# EAGLE board onboard_3 (EAGLE 7.5.0)
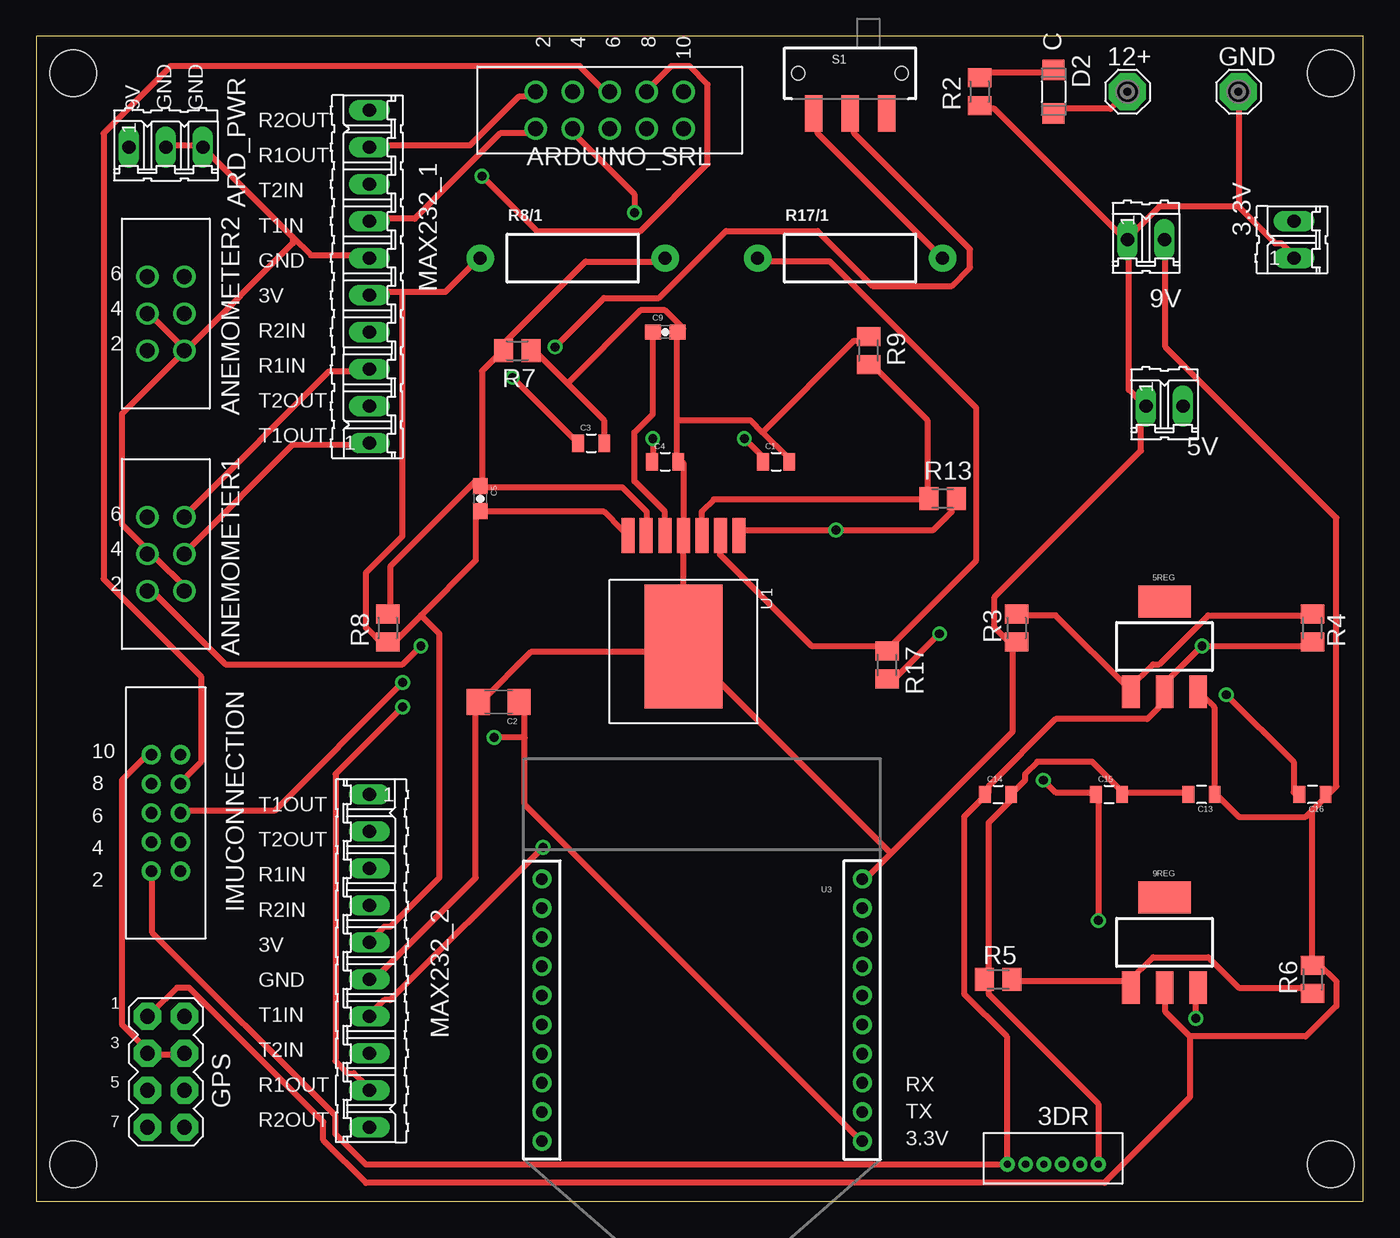
[diagram p0: board, top side]
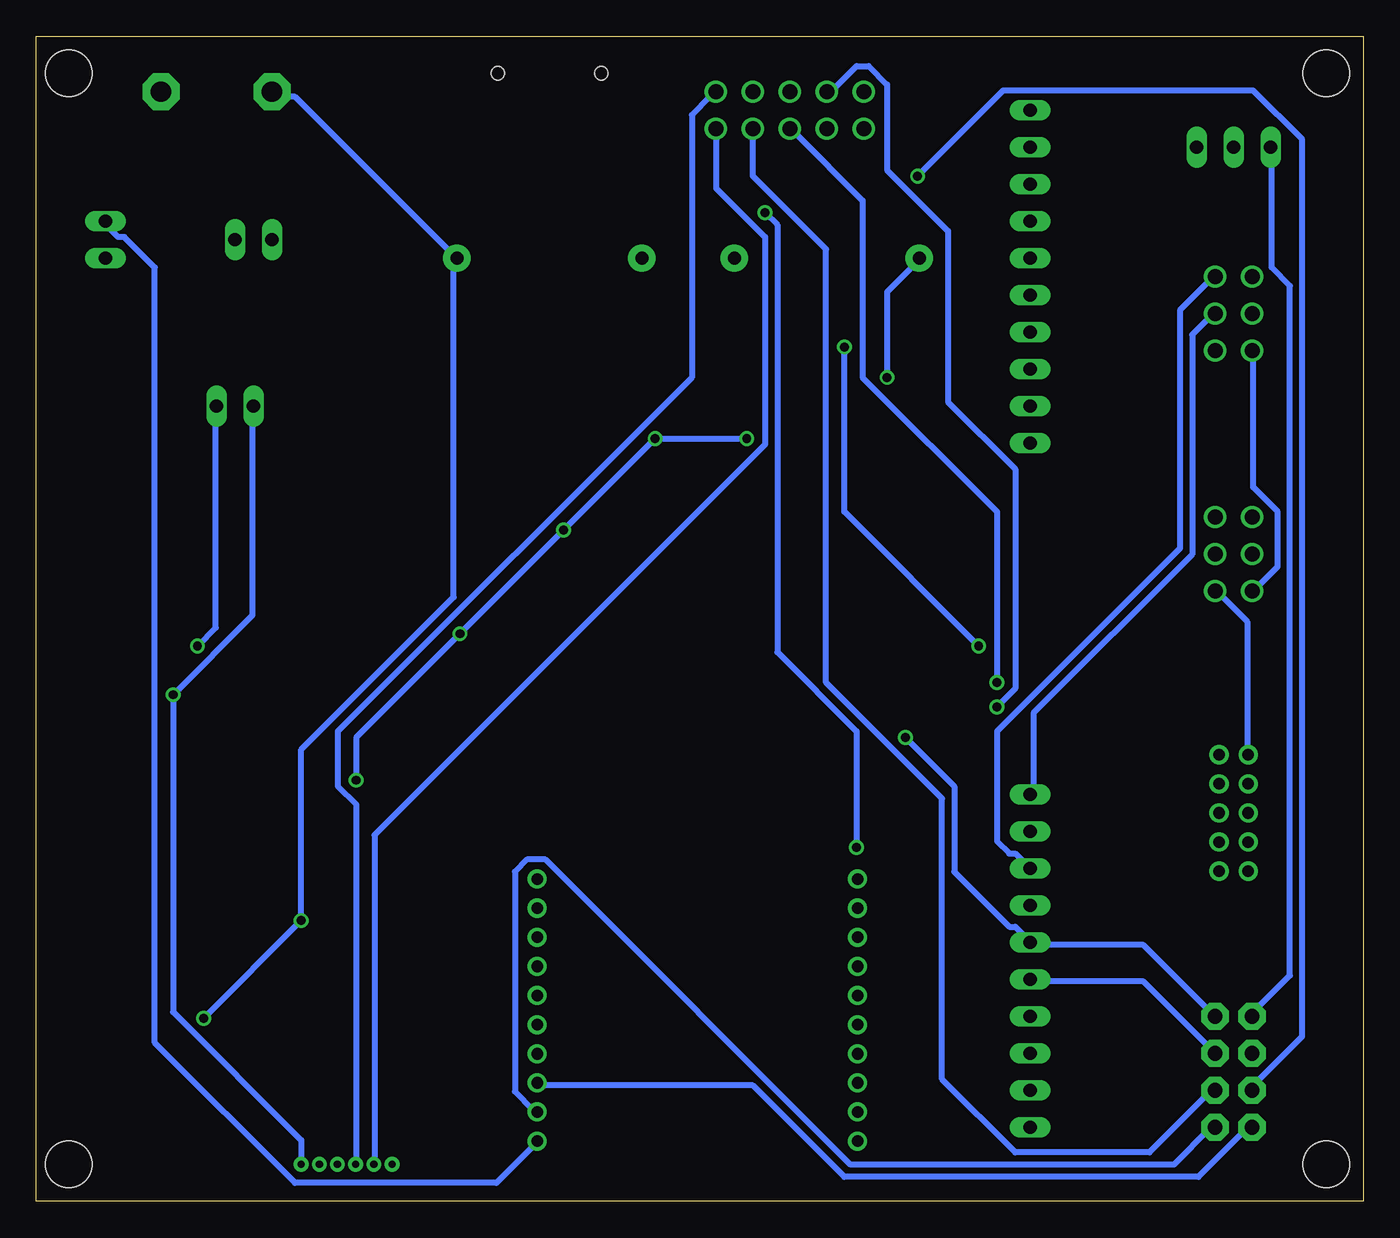
[diagram p1: board, bottom side, seen from below]

Size 91.11 x 80 mm. Coordinates in mm from the lower left corner, seen from the top.
Outline: 0,0 91.11,0 91.11,80 0,80 0,0
Copper layers (1*16): Top 0.035mm / dielectric 1.5mm / Bottom 0.035mm
Design rules "onboard_3": minimum track width 10mil, minimum drill 24mil, track to track 0.205mm, track to pad 0.205mm, pad to pad 0.205mm, via to via 0.205mm, smd to smd 8mil, copper to edge 40mil, drill to drill 8mil, minimum pad ring 10mil, minimum via ring 8mil, stop-mask expansion 4mil, vias tented up to drill 0mil, thermal gap 10mil
Net classes: 0 default: width 0.406 mm, drill 0.406 mm, clearance 0.432 mm
Holes 3.2 mm at 2.54,77.47 88.9,77.47 88.9,2.54 2.54,2.54

## Footprints (pad centres in the part's own frame; a part is rotated, then mirrored left to right if it is on the bottom)
02P = drill 0.914 long: 1 -1.27,0; 2 1.27,0
653006114822 = drill 0.5: 1 0.625,0; 2 -0.625,0; 3 -1.875,0; 4 -3.125,0; 5 -4.375,0; 6 -5.625,0
SOT223 = smd 1.219 x 2.235: 1 -2.311,-3.099; 2 0,-3.099; 3 2.311,-3.099 | smd 3.6 x 2.2: 4 0,3.099
SE14 = drill 1.397 pad 2.54 octagon: MP 0,0
61200622323 = drill 1.02: 1 -2.54,-1.27; 2 -2.54,1.27; 3 0,-1.27; 4 0,1.27; 5 2.54,-1.27; 6 2.54,1.27
03P = drill 0.914 long: 1 -2.54,0; 2 0,0; 3 2.54,0
61201022323 = drill 1.02: 1 -2.54,-1.27; 2 -2.54,1.27; 3 0,-1.27; 4 0,1.27; 5 2.54,-1.27; 6 2.54,1.27; 7 5.08,-1.27; 8 5.08,1.27; 9 7.62,-1.27; 10 7.62,1.27
0805 = smd 0.8 x 1.2: 1 -0.9,0; 2 0.9,0
1206 = smd 1.6 x 1.8: 1 -1.4,0; 2 1.4,0
0603-CAP = smd 1.1 x 1: 1 -0.85,0; 2 0.85,0
1206' = smd 1.4 x 1.5: 1 -1.5,0; 2 1.5,0
2X4 = drill 1.016 pad 1.88 octagon: 1 -3.81,-1.27; 2 -3.81,1.27; 3 -1.27,-1.27; 4 -1.27,1.27; 5 1.27,-1.27; 6 1.27,1.27; 7 3.81,-1.27; 8 3.81,1.27
62501021621 = drill 0.8: 1 -4,-1; 2 -4,1; 3 -2,-1; 4 -2,1; 5 0,-1; 6 0,1; 7 2,-1; 8 2,1; 9 4,-1; 10 4,1
10P = drill 0.914 long: 1 -11.43,0; 2 -8.89,0; 3 -6.35,0; 4 -3.81,0; 5 -1.27,0; 6 1.27,0; 7 3.81,0; 8 6.35,0; 9 8.89,0; 10 11.43,0
M2012 = smd 1.3 x 1.6: 1 -0.95,0; 2 0.95,0
AXIAL-0.5 = drill 0.9 pad 1.88: P$1 -6.35,0; P$2 6.35,0
SWITCH-SPDT-SMD = smd 1.2 x 2.5: 1 -2.5,-2.75; 2 0,-2.75; 3 2.5,-2.75 | hole 0.9: -3.55,0; 3.55,0
TO-PMOD-7 = smd 0.89 x 2.41: 1 -3.81,-7.63; 2 -2.54,-7.63; 3 -1.27,-7.63; 4 0,-7.63; 5 1.27,-7.63; 6 2.57,-7.63; 7 3.81,-7.63 | smd 5.35 x 8.54: EP 0,0
XBEE-1 = drill 0.8: 1 -11,20; 2 -11,18; 3 -11,16; 4 -11,14; 5 -11,12; 6 -11,10; 7 -11,8; 8 -11,6; 9 -11,4; 10 -11,2; 11 11,2; 12 11,4; 13 11,6; 14 11,8; 15 11,10; 16 11,12; 17 11,14; 18 11,16; 19 11,18; 20 11,20

## Placement (x,y rotation side)
3.3V  [02P]  86.36,66.04 90 top
3DR  653006114822  [653006114822]  67.31,2.54 180 top
5REG  V_REG_317SMD  [SOT223]  77.47,38.1 0 top
5V  [02P]  77.47,54.61 0 top
9REG  V_REG_317SMD  [SOT223]  77.47,17.78 0 top
9V  [02P]  76.2,66.04 0 top
12+  SE14  [SE14]  74.93,76.2 0 top
ANEMOMETER1  61200622323  [61200622323]  8.89,44.45 90 top
ANEMOMETER2  61200622323  [61200622323]  8.89,60.96 90 top
ARD_PWR  [03P]  8.89,72.39 0 top
ARDUINO_SRL  61201022323  [61201022323]  36.83,74.93 0 top
C1  1uF  [0805]  50.8,50.8 0 top
C2  100uF  [1206]  31.75,34.29 180 top
C3  1uF  [0805]  38.1,52.07 0 top
C4  10uF  [0805]  43.18,50.8 0 top
C5  0.022uF  [0603-CAP]  30.48,48.26 270 top
C9  0.022uF  [0603-CAP]  43.18,59.69 0 top
C13  0.1UF  [0805]  80.01,27.94 180 top
C14  1UF  [0805]  66.04,27.94 0 top
C15  0.1UF  [0805]  73.66,27.94 0 top
C16  1UF  [0805]  87.63,27.94 180 top
D2  [1206']  69.85,76.2 270 top
GND  SE14  [SE14]  82.55,76.2 0 top
GPS  [2X4]  8.89,8.89 270 top
IMUCONNECTION  [62501021621]  8.89,26.67 90 top
MAX232_1  [10P]  22.86,63.5 90 top
MAX232_2  [10P]  22.86,16.51 270 top
R2  [M2012]  64.77,76.2 90 top
R3  750 ohms  [M2012]  67.31,39.37 90 top
R4  240 ohms  [M2012]  87.63,39.37 270 top
R5  1.5k  [M2012]  66.04,15.24 0 top
R6  240 ohms  [M2012]  87.63,15.24 90 top
R7  1.07k  [M2012]  33.02,58.42 180 top
R8  5.62k  [M2012]  24.13,39.37 90 top
R8/1  [AXIAL-0.5]  36.83,64.77 0 top
R9  11.8k  [M2012]  57.15,58.42 270 top
R13  68.1k  [M2012]  62.23,48.26 0 top
R17  100k  [M2012]  58.42,36.83 270 top
R17/1  [AXIAL-0.5]  55.88,64.77 0 top
S1  [SWITCH-SPDT-SMD]  55.88,77.47 0 top
U1  LMZ14203  [TO-PMOD-7]  44.45,38.1 180 top
U3  XBEE  [XBEE-1]  45.72,24.13 180 top

## Library data of the parts
3.3V 5V 9V ARD_PWR MAX232_1 MAX232_2 = con-amp-quick; OC_FARNELL: unknown; OC_NEWARK: unknown
3DR ARDUINO_SRL = Wire_to_Board_Connectors_rev15d; OC_NEWARK: unknown
5REG 9REG U1 = SparkFun-PowerIC; OC_NEWARK: unknown
12+ GND = solpad; OC_NEWARK: unknown
ANEMOMETER1 ANEMOMETER2 IMUCONNECTION = Wurth_Elektronik_Electromechanic_Wire_to_Board_Connectors_rev15c; OC_NEWARK: unknown
C1 C3 = SparkFun-Capacitors; MF: VISHAY/SPRAGUE; MPN: 1C10Z5U104M050R; OC_NEWARK: 66C6034; PROD_ID: CAP-08064
C2 C4 C5 C9 = SparkFun-Capacitors; OC_NEWARK: unknown
C13-C16 = SparkFun-Capacitors; OC_NEWARK: unknown; PROD_ID: CAP-08064
D2 = Wuerth_Elektronik_LEDs_rev15b; COMPANY-URL: http://www.we-online.de; CREATED-BY: Christin Otto; CREATED-DATE: APR 2013; DATASHEET-URL: http://katalog.we-online.de/en/led/WL-SMCW?m=t&sq=smcw&sp=&sp=http%3A%2F%2Fwww.we-online.de%2Fweb%2Fen%2Felectronic_components%2Fsearchpage_PBS.php%3Fsearch%3Dsmcw#vs_t2:2; MANUFACTURER: Würth Elektronik eiSos GmbH; OC_NEWARK: unknown
GPS = SparkFun-Connectors; OC_NEWARK: unknown
R2 R7-R9 R13 R17 = resistor; OC_NEWARK: unknown
R3-R6 = adafruit; OC_NEWARK: unknown
R8/1 R17/1 = SparkFun-Passives; OC_NEWARK: unknown
S1 = SparkFun-Electromechanical; OC_NEWARK: unknown
U3 = SparkFun; OC_NEWARK: unknown

## Nets
3.3V: 3.3V.2 C2.1 C3.1 C5.2 GPS.2 MAX232_1.5 MAX232_2.5 R8.1 R8/1.P$1 U1.7 U3.1
3DR_RX: 3DR.3 ARDUINO_SRL.10
3DR_TX: 3DR.2 ARDUINO_SRL.9
+5V: 3DR.1 5REG.2 5V.2 C14.1 IMUCONNECTION.2 R4.2
+9V: 5REG.3 9REG.2 9V.2 ARD_PWR.1 C13.1 C16.1 GPS.1 R6.2
+12V: 9REG.3 12+.MP C1.1 C4.1 C15.1 D2.2 R13.2 R17.2 R17/1.P$2 S1.1 U1.1
A1_IN_RX: ANEMOMETER1.5 MAX232_1.3
A1_IN_TX: ANEMOMETER1.3 MAX232_1.1
A1_RX: ARDUINO_SRL.2 MAX232_1.9
A1_TX: ARDUINO_SRL.1 MAX232_1.7
A2_IN_RX: ANEMOMETER2.5 MAX232_2.3
A2_IN_TX: ANEMOMETER2.3 MAX232_2.1
A2_RX: ARDUINO_SRL.4 MAX232_2.9
A2_TX: ARDUINO_SRL.3 MAX232_2.7
CTS: 3DR.4
GND: 3.3V.1 3DR.6 5V.1 9V.1 ANEMOMETER1.1 ANEMOMETER1.4 ANEMOMETER2.1 ANEMOMETER2.4 ARD_PWR.2 ARD_PWR.3 C1.2 C2.2 C3.2 C4.2 C9.2 C13.2 C14.2 C15.2 C16.2 GND.MP GPS.3 GPS.4 IMUCONNECTION.10 MAX232_1.6 MAX232_2.6 R2.1 R3.1 R5.1 R7.1 R9.1 U1.4 U1.EP U3.10
GPS_RX: ARDUINO_SRL.8 GPS.5
GPS_TX: ARDUINO_SRL.7 GPS.6
IMU_RX: ARDUINO_SRL.6 IMUCONNECTION.7
IMU_TX: ARDUINO_SRL.5 IMUCONNECTION.5
N$1: U3.5
N$2: 5REG.1 R3.2 R4.1
N$3: 9REG.1 R5.2 R6.1
N$4: R9.2 R13.1 U1.3
N$5: R17.1 R17/1.P$1 U1.2
N$6: C9.1 U1.5
N$7: D2.1 R2.2
N$8: C5.1 R7.2 R8.2 R8/1.P$2 U1.6
N$9: ANEMOMETER1.2 ANEMOMETER2.2 S1.2
N$24: U3.4
N$26: U3.6
N$27: U3.7
N$28: U3.8
N$29: U3.9
N$31: U3.11
N$32: U3.12
N$33: U3.13
N$34: U3.14
N$35: U3.15
N$36: U3.16
N$37: U3.17
N$38: U3.18
N$39: U3.19
N$40: U3.20
RTS: 3DR.5
XBEE_RX: GPS.7 U3.3
XBEE_TX: GPS.8 U3.2

## Tracks (layer width: path | path; a pad name or v marks a point on that pad's centre or on a via)
3.3V  (via drill 0.61)
  Top 0.406: v32.69,56.58 36.88,52.39 C3.1 | 25.15,62.45 28.08,62.45 30.18,64.54 R8/1.P$1 | 25.15,62.45 23.05,62.45 MAX232_1.5 | U1.7 40.23,46.1 38.98,47.36 30.59,47.36 C5.2 30.18,47.36 30.18,44.01 26.4,40.23 | 26.4,40.23 24.73,38.56 24.31,38.56 R8.1 23.89,38.14 22.63,39.4 22.63,43.17 25.15,45.68 25.15,62.45 | 26.4,40.23 27.66,38.98 27.66,22.21 24.31,18.86 23.89,18.86 23.05,18.02 MAX232_2.5 | 33.53,31.85 33.53,27.24 56.58,4.19 U3.1 | 33.53,31.85 33.53,33.95 C2.1 | 33.53,31.85 v31.43,31.85
  Bottom 0.406: v32.69,56.58 32.69,62.45 30.59,64.54 R8/1.P$1 | GPS.2 10.48,12.99 15.09,17.6 22.63,17.6 MAX232_2.5 23.05,18.02 23.89,18.86 24.31,18.86 28.08,22.63 28.08,28.5 v31.43,31.85 | 3.3V.2 86.33,67.06 85.5,66.22 85.08,66.22 82.98,64.12 82.98,10.9 73.34,1.26 59.51,1.26 57,3.77 U3.1
3DR_RX
  Bottom 0.406: 3DR.3 69.15,2.93 69.15,27.24 70.41,28.5 70.41,32.27 46.1,56.58 46.1,74.6 44.84,75.86 ARDUINO_SRL.10
3DR_TX
  Bottom 0.406: 3DR.2 67.89,2.93 67.89,25.15 41.07,51.97 41.07,66.22 44.42,69.57 44.42,73.34 ARDUINO_SRL.9
+5V  (via drill 0.61)
  Top 0.406: R4.2 87.59,38.14 v80.05,38.14 77.11,35.2 5REG.2 77.11,34.78 77.11,33.95 76.28,33.11 69.99,33.11 65.38,28.5 65.38,28.08 C14.1 64.96,27.66 63.7,26.4 63.7,14.25 66.64,11.32 66.64,2.93 3DR.1 66.64,2.52 22.63,2.52 20.54,4.61 20.54,5.87 7.96,18.44 7.96,22.63 IMUCONNECTION.2
  Bottom 0.406: v80.05,38.14 78.79,39.4 78.79,54.48 5V.2
+9V
  Top 0.406: 5REG.3 80.05,34.78 80.89,33.95 80.89,28.08 C13.1 81.31,27.66 82.56,26.4 87.17,26.4 87.59,26.82 | 87.59,26.82 88.43,27.66 C16.1 88.85,28.08 89.27,28.5 89.27,46.94 77.53,58.67 77.53,65.8 9V.2 | 87.59,26.82 87.59,16.34 R6.2 88.01,16.34 89.27,15.09 89.27,13.41 87.17,11.32 79.21,11.32 | 79.21,11.32 77.53,12.99 77.53,14.67 9REG.2 | 79.21,11.32 79.21,7.12 73.34,1.26 22.63,1.26 19.7,4.19 19.7,5.45 10.48,14.67 9.64,14.67 7.96,12.99 GPS.1
  Bottom 0.406: ARD_PWR.1 6.29,72.08 6.29,64.12 5.03,62.87 5.03,15.51 7.54,12.99 GPS.1
+12V  (via drill 0.61)
  Top 0.406: D2.2 69.99,75.02 73.76,75.02 74.6,75.86 12+.MP | S1.1 53.65,74.6 53.65,73.34 62.03,64.96 R17/1.P$2 | R13.2 62.87,48.2 62.87,47.36 61.61,46.1 v54.9,46.1 48.62,46.1 U1.1 | v42.33,52.39 42.33,51.13 C4.1 | v48.62,52.39 49.87,51.13 C1.1 | v69.15,28.92 69.99,28.08 72.5,28.08 C15.1 72.92,27.66 v72.92,19.28 | v62.03,38.98 59.09,36.04 58.67,36.04 R17.2 | v79.63,12.57 79.63,14.67 9REG.3
  Bottom 0.406: 12+.MP 74.6,75.86 73.34,75.86 62.45,64.96 R17/1.P$2 62.45,64.54 62.45,41.49 72.92,31.01 v72.92,19.28 v79.63,12.57 | v42.33,52.39 v48.62,52.39 v54.9,46.1 v62.03,38.98 69.15,31.85 v69.15,28.92
A1_IN_RX
  Top 0.406: MAX232_1.3 22.63,57 20.12,57 10.48,47.36 ANEMOMETER1.5
A1_IN_TX
  Top 0.406: MAX232_1.1 22.63,51.97 17.6,51.97 10.48,44.84 ANEMOMETER1.3
A1_RX
  Top 0.406: MAX232_1.9 23.05,72.5 29.76,72.5 33.11,75.86 33.95,75.86 ARDUINO_SRL.2
A1_TX
  Top 0.406: MAX232_1.7 23.05,67.47 25.98,67.47 31.85,73.34 33.95,73.34 ARDUINO_SRL.1
A2_IN_RX
  Bottom 0.406: MAX232_2.3 23.89,23.89 24.31,23.89 25.15,24.73 25.15,32.27 12.57,44.84 12.57,61.19 10.48,63.28 ANEMOMETER2.5
A2_IN_TX
  Bottom 0.406: MAX232_2.1 22.63,28.08 22.63,33.53 11.73,44.42 11.73,59.51 10.48,60.77 ANEMOMETER2.3
A2_RX  (via drill 0.61)
  Top 0.406: v25.15,33.95 20.54,29.34 20.54,9.64 21.37,8.8 21.79,8.8 22.63,7.96 MAX232_2.9
  Bottom 0.406: v25.15,33.95 23.89,35.2 23.89,50.29 28.5,54.9 28.5,66.64 32.69,70.83 32.69,76.69 33.95,77.95 34.78,77.95 36.46,76.28 ARDUINO_SRL.4
A2_TX  (via drill 0.61)
  Top 0.406: v34.78,24.31 24.31,13.83 23.89,13.83 23.05,12.99 MAX232_2.7 | v41.07,67.89 41.07,69.15 36.88,73.34 ARDUINO_SRL.3
  Bottom 0.406: v34.78,24.31 34.78,32.27 40.23,37.72 40.23,67.06 v41.07,67.89
GND  (via drill 0.61)
  Top 0.406: 74.6,28.08 72.5,30.18 68.73,30.18 67.89,29.34 67.89,28.92 67.06,28.08 C14.2 67.06,27.66 65.38,25.98 65.38,15.51 R5.1 65.38,15.09 65.38,14.25 72.92,6.71 72.92,2.93 3DR.6 | 74.6,28.08 78.79,28.08 C13.2 | 74.6,28.08 C15.2 | R2.1 64.96,75.02 65.8,75.02 74.6,66.22 9V.1 | 82.56,68.31 85.08,65.8 85.5,65.8 86.33,64.96 3.3V.1 | 82.56,68.31 82.56,75.86 GND.MP | 82.56,68.31 77.11,68.31 75.02,66.22 9V.1 | v81.72,34.78 86.33,30.18 86.33,28.08 C16.2 | 9V.1 75.02,65.8 75.02,55.74 75.86,54.9 5V.1 75.86,54.48 75.86,51.55 65.8,41.49 65.8,39.4 67.06,38.14 | 36.46,56.16 34.37,58.26 R7.1 | 36.46,56.16 38.98,53.65 38.98,52.39 C3.2 | 44.01,53.65 44.01,51.13 C4.2 44.42,50.71 44.42,46.1 U1.4 44.42,45.68 44.42,38.14 U1.EP | 44.01,53.65 44.01,59.51 C9.2 44.42,59.93 43.17,61.19 41.49,61.19 36.46,56.16 | 49.87,52.81 49.03,53.65 44.01,53.65 | 49.87,52.81 51.55,51.13 C1.2 | 49.87,52.81 56.16,59.09 57,59.09 R9.1 | 67.06,38.14 67.06,32.27 58.67,23.89 | 58.67,23.89 57,22.21 U3.10 | U1.EP 44.42,37.72 33.95,37.72 30.59,34.37 C2.2 30.18,33.95 30.18,22.21 23.05,15.09 MAX232_2.6 | 58.67,23.89 44.84,37.72 U1.EP | GPS.4 10.06,10.06 7.96,10.06 GPS.3 7.54,10.48 5.87,12.15 5.87,28.92 7.54,30.59 IMUCONNECTION.10 | ANEMOMETER1.1 10.48,41.91 7.96,44.42 ANEMOMETER1.4 7.54,44.84 5.87,46.52 5.87,54.06 10.06,58.26 ANEMOMETER2.1 | ANEMOMETER2.4 7.96,60.77 10.06,58.67 ANEMOMETER2.1 | ARD_PWR.2 9.22,72.5 11.32,72.5 ARD_PWR.3 17.6,66.22 | 17.6,66.22 18.86,64.96 22.63,64.96 MAX232_1.6 | 17.6,66.22 17.6,65.8 10.48,58.67 ANEMOMETER2.1 | 67.06,38.14 R3.1
  Bottom 0.406: 5V.1 76.28,54.48 76.28,40.23 v81.72,34.78 81.72,12.99 72.92,4.19 72.92,2.93 3DR.6 | GPS.4 15.09,15.09 22.63,15.09 MAX232_2.6 | IMUCONNECTION.10 7.96,31.01 7.96,39.81 10.06,41.91 ANEMOMETER1.1
GPS_RX  (via drill 0.61)
  Top 0.406: v30.59,70.41 34.37,66.64 41.49,66.64 46.1,71.25 46.1,76.69 44.84,77.95 43.59,77.95 41.91,76.28 ARDUINO_SRL.8
  Bottom 0.406: v30.59,70.41 24.73,76.28 7.54,76.28 4.19,72.92 4.19,11.32 7.54,7.96 GPS.5
GPS_TX
  Bottom 0.406: ARDUINO_SRL.7 41.91,70.41 36.88,65.38 36.88,35.62 28.92,27.66 28.92,8.38 23.89,3.35 14.67,3.35 10.48,7.54 GPS.6
IMU_RX
  Top 0.406: IMUCONNECTION.7 10.06,28.92 11.32,30.18 11.32,36.04 4.61,42.75 4.61,73.34 9.22,77.95 37.3,77.95 38.98,76.28 ARDUINO_SRL.6
IMU_TX  (via drill 0.61)
  Top 0.406: v25.15,35.62 16.34,26.82 10.06,26.82 IMUCONNECTION.5
  Bottom 0.406: v25.15,35.62 25.15,47.36 34.37,56.58 34.37,68.73 38.98,73.34 ARDUINO_SRL.5
N$2
  Top 0.406: 75.02,35.2 69.99,40.23 67.47,40.23 R3.2 | 75.02,35.2 76.69,36.88 77.11,36.88 80.47,40.23 87.59,40.23 R4.1 | 75.02,35.2 5REG.1
N$3
  Top 0.406: 75.02,15.09 76.69,16.76 80.47,16.76 82.56,14.67 87.59,14.67 R6.1 | 75.02,15.09 67.06,15.09 R5.2 | 75.02,15.09 9REG.1
N$4
  Top 0.406: R9.2 57.42,57.42 61.19,53.65 61.19,48.62 R13.1 61.19,48.2 46.52,48.2 45.68,47.36 45.68,46.1 U1.3
N$5
  Top 0.406: U1.2 46.94,45.68 46.94,44.42 53.23,38.14 58.26,38.14 R17.1 58.67,38.14 64.54,44.01 64.54,54.48 54.48,64.54 49.87,64.54 R17/1.P$1
N$6
  Top 0.406: C9.1 42.33,59.51 42.33,54.06 41.07,52.81 41.07,49.45 43.17,47.36 43.17,46.1 U1.5
N$7
  Top 0.406: D2.1 69.57,77.53 64.96,77.53 R2.2
N$8
  Top 0.406: C5.1 30.59,49.45 30.59,57 31.85,58.26 R7.2 31.85,58.67 37.72,64.54 43.17,64.54 R8/1.P$2 | R8.2 24.31,40.65 24.31,43.59 30.18,49.45 C5.1 | U1.6 41.91,46.1 41.91,47.36 40.23,49.03 30.59,49.03 C5.1
N$9  (via drill 0.61)
  Top 0.406: v35.62,58.67 38.98,62.03 42.75,62.03 47.36,66.64 53.65,66.64 57.42,62.87 62.87,62.87 64.12,64.12 64.12,65.38 56.16,73.34 56.16,74.6 S1.2 | v26.4,38.14 25.15,36.88 12.99,36.88 7.96,41.91 ANEMOMETER1.2
  Bottom 0.406: v35.62,58.67 35.62,47.36 v26.4,38.14 | ANEMOMETER2.2 7.54,58.26 7.54,49.03 5.87,47.36 5.87,43.59 7.54,41.91 ANEMOMETER1.2
XBEE_RX
  Bottom 0.406: U3.3 56.58,7.96 41.91,7.96 35.62,1.68 11.32,1.68 7.96,5.03 GPS.7
XBEE_TX
  Bottom 0.406: U3.2 57,6.29 58.26,7.54 58.26,22.63 57.42,23.47 56.16,23.47 35.2,2.52 12.99,2.52 10.48,5.03 GPS.8

## Text on the board
tPlace: 2 / 4 / 6 / 8 / 10 | 9V / GND / GND | 6 / 4 / 2 | R2OUT / R1OUT / T2IN / T1IN / GND / 3V / R2IN / R1IN / T2OUT / T1OUT | 6 / 4 / 2 | 10 / 8 / 6 / 4 / 2 | 1 / 3 / 5 / 7 | T1OUT / T2OUT / R1IN / R2IN / 3V / GND / T1IN / T2IN / R1OUT / R2OUT | RX / TX / 3.3V